# EAGLE board Smart_Current_Sensor_ETH_2 (EAGLE 7.4.0)
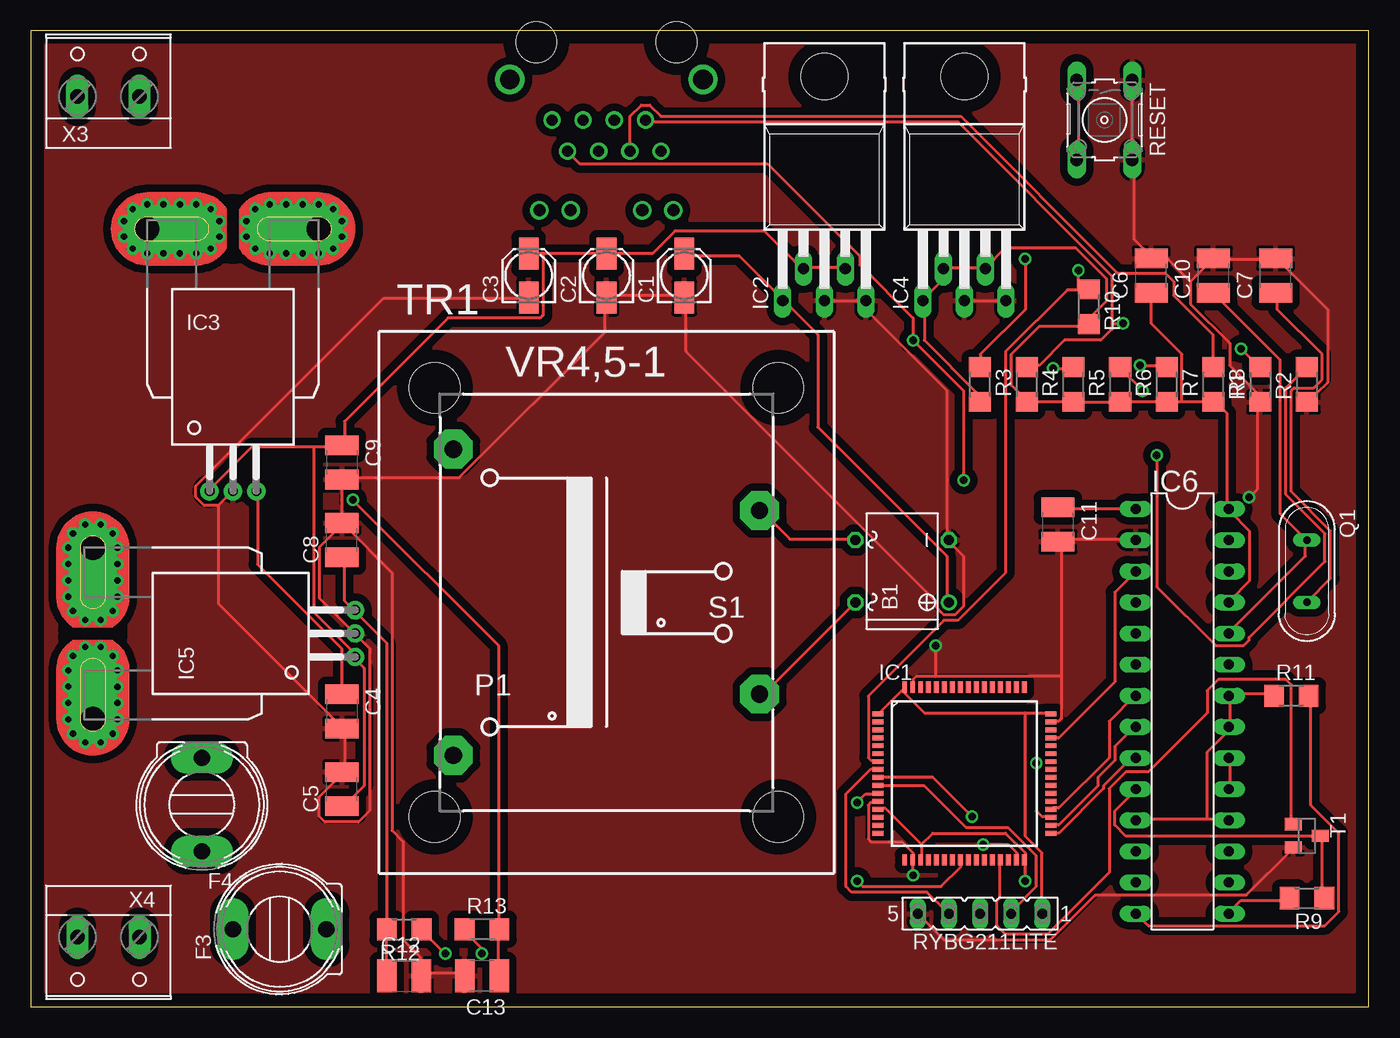
[diagram p0: board, top side]
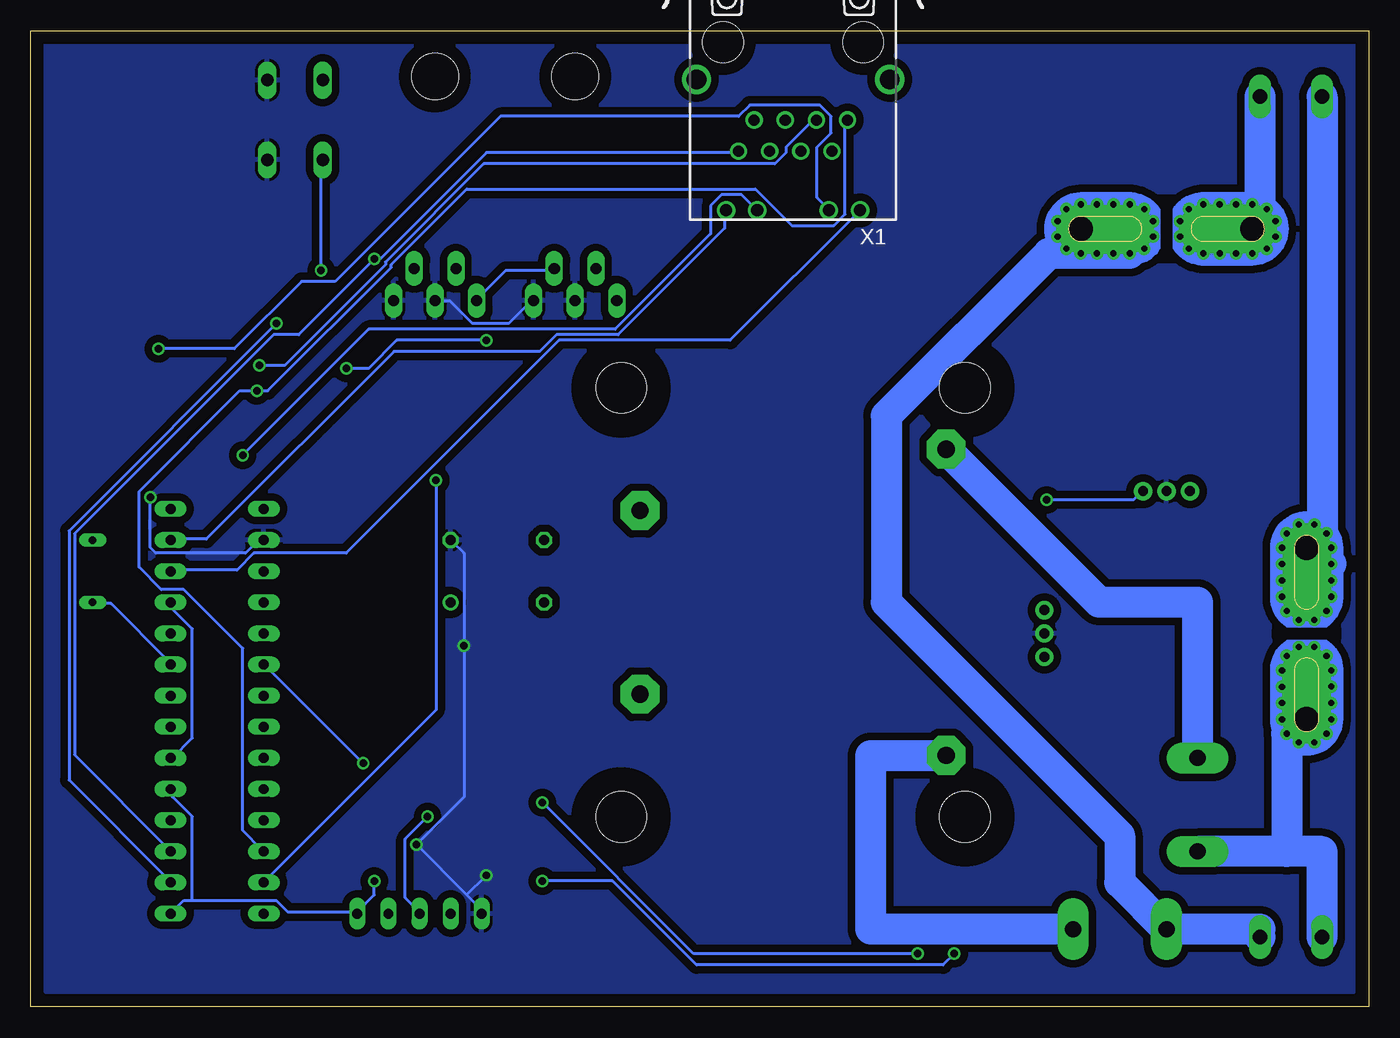
[diagram p1: board, bottom side, seen from below]

Size 109.2 x 79.68 mm. Coordinates in mm from the lower left corner, seen from the top.
Outline: 0,0 109.2,0 109.2,79.68 0,79.68 0,0
Copper layers (1*16): Top 0.035mm / dielectric 1.5mm / Bottom 0.035mm
Design rules "default": minimum track width 10mil, minimum drill 24mil, track to track 8mil, track to pad 8mil, pad to pad 8mil, via to via 8mil, smd to smd 8mil, copper to edge 40mil, drill to drill 8mil, minimum pad ring 10mil, minimum via ring 8mil, stop-mask expansion 4mil, vias tented up to drill 0mil, thermal gap 10mil

## Footprints (pad centres in the part's own frame; a part is rotated, then mirrored left to right if it is on the bottom)
B-DIL = drill 0.813: + -2.54,-3.81 | drill 0.813 octagon: - 2.54,-3.81; AC1 2.54,3.81; AC2 -2.54,3.81
153CLV-0405 = smd 2.6 x 1.6: + 1.8,0; - -1.8,0
C1210 = smd 1.6 x 2.7: 1 -1.4,0; 2 1.4,0
KS9V = drill 1.321 pad 2.54 long: 1 0,3.81; 2 0,-3.81
LQFP64_PACKAGE = smd 0.9 x 0.4: 1 -7.05,4.875; 2 -7.05,4.225; 3 -7.05,3.575; 4 -7.05,2.925; 5 -7.05,2.275; 6 -7.05,1.625; 7 -7.05,0.975; 8 -7.05,0.325; 9 -7.05,-0.325; 10 -7.05,-0.975; 11 -7.05,-1.625; 12 -7.05,-2.275; 13 -7.05,-2.925; 14 -7.05,-3.575; 15 -7.05,-4.225; 16 -7.05,-4.875; 33 7.05,-4.875; 34 7.05,-4.225; 35 7.05,-3.575; 36 7.05,-2.925; 37 7.05,-2.275; 38 7.05,-1.625; 39 7.05,-0.975; 40 7.05,-0.325; 41 7.05,0.325; 42 7.05,0.975; 43 7.05,1.625; 44 7.05,2.275; 45 7.05,2.925; 46 7.05,3.575; 47 7.05,4.225; 48 7.05,4.875 | smd 0.4 x 0.9: 17 -4.875,-7.05; 18 -4.225,-7.05; 19 -3.575,-7.05; 20 -2.925,-7.05; 21 -2.275,-7.05; 22 -1.625,-7.05; 23 -0.975,-7.05; 24 -0.325,-7.05; 25 0.325,-7.05; 26 0.975,-7.05; 27 1.625,-7.05; 28 2.275,-7.05; 29 2.925,-7.05; 30 3.575,-7.05; 31 4.225,-7.05; 32 4.875,-7.05; 49 4.875,7.05; 50 4.225,7.05; 51 3.575,7.05; 52 2.925,7.05; 53 2.275,7.05; 54 1.625,7.05; 55 0.975,7.05; 56 0.325,7.05; 57 -0.325,7.05; 58 -0.975,7.05; 59 -1.625,7.05; 60 -2.275,7.05; 61 -2.925,7.05; 62 -3.575,7.05; 63 -4.225,7.05; 64 -4.875,7.05
TO220-52 = drill 0.9 long: 1 -3.4,-21.1; 2 -1.7,-18.47; 3 0,-21.1; 4 1.7,-18.47; 5 3.4,-21.1 | hole 3.8: 0,-2.8
ACS75050 = drill 0.8 pad 1.5: 1 -1.91,-21.4; 2 0,-21.4; 3 1.91,-21.4 | drill 2 pad 4 offset: IP+ 7,0; IP- -7,0 | drill 0.5 pad 0.9: IP+@2 8.89,-0.635; IP+@3 8.89,0.635; IP+@4 8.175,1.625; IP+@5 7,2; IP+@6 5.675,2; IP+@7 4.325,2; IP+@8 3,2; IP+@9 1.825,1.625; IP+@10 1.1,0.625; IP+@11 1.1,-0.625; IP+@12 1.825,-1.625; IP+@13 3,-2; IP+@14 4.325,-2; IP+@15 5.675,-2; IP+@16 7,-2; IP+@17 8.175,-1.625; IP-@2 -8.89,-0.635; IP-@3 -8.89,0.635; IP-@4 -8.175,1.625; IP-@5 -7,2; IP-@6 -5.675,2; IP-@7 -4.325,2; IP-@8 -3,2; IP-@9 -1.825,1.625; IP-@10 -1.1,0.625; IP-@11 -1.1,-0.625; IP-@12 -1.825,-1.625; IP-@13 -3,-2; IP-@14 -4.35,-2; IP-@15 -5.675,-2; IP-@16 -7,-2; IP-@17 -8.175,-1.625
DIL28-3 = drill 0.813 long: 1 -16.51,-3.81; 2 -13.97,-3.81; 3 -11.43,-3.81; 4 -8.89,-3.81; 5 -6.35,-3.81; 6 -3.81,-3.81; 7 -1.27,-3.81; 8 1.27,-3.81; 9 3.81,-3.81; 10 6.35,-3.81; 11 8.89,-3.81; 12 11.43,-3.81; 13 13.97,-3.81; 14 16.51,-3.81; 15 16.51,3.81; 16 13.97,3.81; 17 11.43,3.81; 18 8.89,3.81; 19 6.35,3.81; 20 3.81,3.81; 21 1.27,3.81; 22 -1.27,3.81; 23 -3.81,3.81; 24 -6.35,3.81; 25 -8.89,3.81; 26 -11.43,3.81; 27 -13.97,3.81; 28 -16.51,3.81
QS = drill 0.61 long: 1 -2.54,0; 2 2.54,0
R1206 = smd 1.6 x 1.803: 1 -1.422,0; 2 1.422,0
B3F-10XX = drill 1.016 long: 1 -3.251,2.261; 2 3.251,2.261; 3 -3.251,-2.261; 4 3.251,-2.261
FE05-1 = drill 0.813 long: 1 -5.08,0; 2 -2.54,0; 3 0,0; 4 2.54,0; 5 5.08,0
SOT23 = smd 1 x 1.4: 1 -0.95,-1.1; 2 0.95,-1.1; 3 0,1.1
VR04,5-1 = drill 1.397 pad 3.175 octagon: 1 -12.497,12.497; 2 -12.497,-12.497; 3 12.497,-7.493; 4 12.497,7.493 | hole 4.115: -14.021,-17.501; -14.021,17.501; 14.021,17.501; 14.021,-17.501
J1 = drill 0.9 pad 1.3: 1 4.445,2.54; 2 3.175,0; 3 1.905,2.54; 4 0.635,0; 5 -0.635,2.54; 6 -1.905,0; 7 -3.175,2.54; 8 -4.445,0 | drill 1 pad 1.422: 9 5.465,7.37; 10 2.925,7.37; 11 -2.925,7.37; 12 -5.465,7.37 | drill 1.6 pad 2.184: M1 -7.875,-3.3; M2 7.875,-3.3 | hole 3.3: 5.715,-6.35; -5.715,-6.35
W237-132 = drill 1.194 long: 1 -2.54,-0.635; 2 2.54,-0.635

## Placement (x,y rotation side)
B1  [B-DIL]  71.12,35.56 90 top
C1  680uF  [153CLV-0405]  53.34,59.69 90 top
C2  220uF  [153CLV-0405]  46.99,59.69 90 top
C3  220uF  [153CLV-0405]  40.64,59.69 90 top
C4  1uF  [C1210]  25.4,24.13 270 top
C5  1uF  [C1210]  25.4,17.78 90 top
C6  1uF  [C1210]  91.44,59.69 90 top
C7  20pF  [C1210]  101.6,59.69 90 top
C8  1uF  [C1210]  25.4,38.1 90 top
C9  1uF  [C1210]  25.4,44.45 270 top
C10  20pF  [C1210]  96.52,59.69 90 top
C11  10uF  [C1210]  83.82,39.37 270 top
C12  10nF  [C1210]  30.48,2.54 0 top
C13  10nF  [C1210]  36.83,2.54 180 top
F3  [KS9V]  20.32,6.35 90 top
F4  [KS9V]  13.97,16.51 180 top
IC1  STM32U535_U545_LQFP64  [LQFP64_PACKAGE]  76.2,19.05 0 top
IC2  [TO220-52]  64.77,78.74 0 top
IC3  ACS750SCA-050  [ACS75050]  16.51,63.5 0 top
IC4  [TO220-52]  76.2,78.74 0 top
IC5  ACS750SCA-050  [ACS75050]  5.08,30.48 90 top
IC6  ENC28J60SP  [DIL28-3]  93.98,24.13 270 top
Q1  25MHz  [QS]  104.14,35.56 270 top
R1  1k  [R1206]  100.33,50.8 90 top
R2  1k  [R1206]  104.14,50.8 90 top
R3  1k  [R1206]  77.47,50.8 270 top
R4  1k  [R1206]  81.28,50.8 270 top
R5  1k  [R1206]  85.09,50.8 270 top
R6  1k  [R1206]  88.9,50.8 270 top
R7  1k  [R1206]  92.71,50.8 270 top
R8  1k  [R1206]  96.52,50.8 270 top
R9  10k  [R1206]  104.14,8.89 180 top
R10  10k  [R1206]  86.36,57.15 270 top
R11  10k  [R1206]  102.87,25.4 0 top
R12  100  [R1206]  30.48,6.35 180 top
R13  100  [R1206]  36.83,6.35 0 top
RESET  [B3F-10XX]  87.63,72.39 270 top
RYBG211LITE  [FE05-1]  77.47,7.62 180 top
T1  BC848  [SOT23]  104.14,13.97 270 top
TR1  [VR04,5-1]  46.99,33.02 0 top
X1  J1006F01P  [J1]  46.99,72.39 180 bottom
X3  [W237-132]  6.35,74.93 0 top
X4  [W237-132]  6.35,5.08 180 top

## Library data of the parts
B1 = rectifier
C1-C3 = rcl
C4-C13 = eagle-ltspice; SPICEMODEL: NONE; SPICEPREFIX: C
F3 F4 = fuse; OC_FARNELL: unknown; OC_NEWARK: unknown
IC1 = STM23UXX
IC2 IC4 = linear
IC3 IC5 = allegro; MF: ALLEGRO MICROSYSTEMS, INC.; MPN: ACS750SCA-050; OC_FARNELL: 1457175; OC_NEWARK: 81H6588
IC6 = microchip; MF: MICROCHIP; MPN: ENC28J60/SP; OC_FARNELL: 1084619; OC_NEWARK: 96K3661
Q1 = special
R1-R13 = eagle-ltspice; SPICEMODEL: NONE; SPICEPREFIX: R
RESET = switch-omron; MPN: B3F-1000; OC_FARNELL: 176432; OC_NEWARK: 36M3542
RYBG211LITE = con-lsta; OC_FARNELL: unknown; OC_NEWARK: unknown
T1 = transistor
TR1 = trafo
X1 = con-pulse; OC_FARNELL: unknown; OC_NEWARK: unknown
X3 X4 = con-wago-508; OC_FARNELL: unknown; OC_NEWARK: unknown

## Nets
+5V: C2.+ C3.+ C5.1 C6.1 C9.1 IC1.1 IC1.13 IC1.19 IC1.32 IC1.48 IC1.64 IC2.2 IC2.4 IC3.1 IC4.1 IC4.2 IC4.4 IC5.1 IC6.15 IC6.19 IC6.20 IC6.25 IC6.28 R3.2 R4.2 R5.2 R6.2 R7.2 R8.2 R9.2 R10.2 RYBG211LITE.1
GND: B1.- C1.- C2.- C3.- C4.2 C5.2 C6.2 C7.2 C8.2 C9.2 C10.2 C11.2 C12.2 C13.2 IC1.12 IC1.18 IC1.31 IC1.47 IC1.63 IC2.3 IC2.5 IC3.2 IC4.3 IC4.5 IC5.2 IC6.2 R1.1 R2.1 RESET.1 RESET.2 RYBG211LITE.5 T1.2
N$1: B1.AC1 TR1.4
N$2: B1.AC2 TR1.3
N$3: R1.2 X1.11
N$4: B1.+ C1.+ IC2.1
N$5: IC5.IP+ IC5.IP+@2 IC5.IP+@3 IC5.IP+@4 IC5.IP+@5 IC5.IP+@6 IC5.IP+@7 IC5.IP+@8 IC5.IP+@9 IC5.IP+@10 IC5.IP+@11 IC5.IP+@12 IC5.IP+@13 IC5.IP+@14 IC5.IP+@15 IC5.IP+@16 IC5.IP+@17 X3.1
N$6: IC3.IP- IC3.IP-@2 IC3.IP-@3 IC3.IP-@4 IC3.IP-@5 IC3.IP-@6 IC3.IP-@7 IC3.IP-@8 IC3.IP-@9 IC3.IP-@10 IC3.IP-@11 IC3.IP-@12 IC3.IP-@13 IC3.IP-@14 IC3.IP-@15 IC3.IP-@16 IC3.IP-@17 X3.2
N$7: C4.1 C13.1 IC3.3 R13.2
N$8: R2.2 X1.10
N$9: IC6.17 R3.1 X1.1
N$10: IC6.16 R4.1 X1.2
N$11: IC6.13 R5.1 X1.7
N$12: IC6.12 R6.1 X1.8
N$13: IC1.8 RYBG211LITE.4
N$14: IC6.27 X1.9
N$15: IC6.26 X1.12
N$16: IC1.9 RYBG211LITE.3
N$17: IC1.10 RYBG211LITE.2
N$18: IC1.7 R10.1 RESET.3 RESET.4
N$19: R7.1 X1.6
N$20: F4.2 TR1.1
N$21: F4.1 IC5.IP- IC5.IP-@2 IC5.IP-@3 IC5.IP-@4 IC5.IP-@5 IC5.IP-@6 IC5.IP-@7 IC5.IP-@8 IC5.IP-@9 IC5.IP-@10 IC5.IP-@11 IC5.IP-@12 IC5.IP-@13 IC5.IP-@14 IC5.IP-@15 IC5.IP-@16 IC5.IP-@17 X4.2
N$22: C8.1 C12.1 IC5.3 R12.2
N$23: R8.1 X1.3
N$24: IC6.11 IC6.18 IC6.21 IC6.22 R11.1
N$25: IC1.36 IC6.7
N$26: C7.1 IC6.23 Q1.2
N$27: C10.1 IC6.24 Q1.1
N$28: IC1.34 IC6.8
N$29: IC1.35 IC6.6
N$30: IC1.33 IC6.9
N$31: IC1.29 T1.1
N$32: IC6.10 R9.1 T1.3
N$33: IC6.14 R11.2
N$34: C11.1 IC6.1
N$35: IC1.45 IC6.3
N$36: IC1.24 R12.1
N$37: IC1.11 R13.1
N$38: F3.2 TR1.2
N$39: F3.1 IC3.IP+ IC3.IP+@2 IC3.IP+@3 IC3.IP+@4 IC3.IP+@5 IC3.IP+@6 IC3.IP+@7 IC3.IP+@8 IC3.IP+@9 IC3.IP+@10 IC3.IP+@11 IC3.IP+@12 IC3.IP+@13 IC3.IP+@14 IC3.IP+@15 IC3.IP+@16 IC3.IP+@17 X4.1

## Tracks (layer width: path | path; a pad name or v marks a point on that pad's centre or on a via)
+5V  (via drill 0.61)
  Top 0.254: IC6.25 97.84,33.15 99.44,34.75 99.44,38.86 97.84,40.46 IC6.28 97.61,40.69 97.61,48.46 96.7,49.38 R8.2 96.47,49.38 93.95,49.38 | 93.95,49.38 92.81,49.38 R7.2 92.58,49.38 88.92,49.38 R6.2 88.7,49.38 85.27,49.38 R5.2 85.04,49.38 81.38,49.38 R4.2 81.15,49.61 80.01,50.75 80.01,53.26 82.3,55.55 86.18,55.55 R10.2 86.41,55.78 86.41,56.24 87.78,57.61 87.78,59.44 85.27,61.95 79.55,61.95 77.95,60.35 IC4.4 77.72,60.35 74.52,60.35 IC4.2 74.3,60.12 74.3,59.21 72.92,57.84 IC4.1 72.92,57.61 72.92,54.41 77.27,50.06 77.27,49.61 R3.2 | C6.1 91.44,55.78 93.95,53.26 93.95,49.38 | 71.09,25.83 71.32,26.06 IC1.64 | 71.09,25.83 69.27,24 IC1.1 | 81.15,24 72.92,24 71.09,25.83 | 81.15,24 83.21,24 IC1.48 | 72.69,13.26 72.69,12.12 IC1.19 | 72.69,13.26 69.72,16.23 69.27,16.23 IC1.13 | 72.69,13.26 73.61,14.17 79.55,14.17 81.15,12.57 81.15,12.12 IC1.32 81.15,11.89 v81.15,10.29 | IC6.19 97.84,17.83 97.84,20.12 IC6.20 | R9.2 102.64,8.69 98.75,8.69 97.84,7.77 IC6.15 | 81.15,24 81.15,13.95 82.53,12.57 82.53,7.77 RYBG211LITE.1 | C5.1 25.6,16.46 27.2,18.06 27.2,27.66 26.52,28.35 IC5.1 26.29,28.57 26.29,29.03 23.09,32.23 23.09,45.72 | 23.09,45.72 18.06,45.72 14.63,42.29 IC3.1 | 23.09,45.72 25.38,45.72 C9.1 25.6,45.95 25.6,47.78 34.06,56.24 41.6,56.24 41.83,56.46 41.83,61.49 | 41.83,61.49 46.86,61.49 C2.+ 47.09,61.49 50.75,61.49 52.58,63.32 59.89,63.32 62.87,60.35 IC2.2 63.09,60.35 66.29,60.35 IC2.4 | 41.83,61.49 40.69,61.49 C3.+
  Bottom 0.254: 96.01,8.69 96.7,8.69 97.61,7.77 IC6.15 | 96.01,8.69 89.15,8.69 88.24,7.77 82.75,7.77 RYBG211LITE.1 82.53,7.77 81.15,9.14 v81.15,10.29 | 96.01,8.69 96.01,15.54 97.61,17.14 97.61,17.6 IC6.19 | IC6.25 97.61,32.92 97.61,32.46 96.01,30.86 96.01,21.95 97.61,20.34 IC6.20 | IC2.4 66.52,60.12 70.41,60.12 72.69,57.84 IC4.1
GND  (via drill 0.61)
  Top 0.254: 15.32,40.92 14.17,40.92 13.49,41.6 13.49,42.52 28.8,57.84 40.46,57.84 C3.- | 15.32,40.92 16.46,42.06 IC3.2 | 15.32,40.92 15.32,32.92 25.38,22.86 C4.2 25.6,22.63 25.6,19.2 C5.2 25.38,18.97 23.55,17.14 23.55,15.54 24,15.09 26.75,15.09 27.66,16 27.66,29.26 26.52,30.4 IC5.2 26.29,30.63 23.55,33.38 23.55,37.49 25.38,39.32 C8.2 | C13.2 35.2,2.74 32,2.74 C12.2 31.77,2.74 31.77,4.12 30.4,5.49 30.4,13.49 29.49,14.4 29.49,35.43 25.6,39.32 C8.2 | C8.2 25.38,39.55 25.38,42.98 C9.2 25.6,43.2 34.98,43.2 46.86,55.09 46.86,57.84 C2.- 47.09,58.06 53.26,58.06 C1.- 53.49,57.84 53.49,53.49 73.84,33.15 73.84,32.69 74.52,32 75.44,32 76.12,32.69 76.12,36.8 74.98,37.95 B1.- 74.75,38.18 74.75,50.29 68.35,56.69 68.35,57.61 IC2.5 68.12,57.61 64.92,57.61 IC2.3 | R2.1 104.24,49.61 104.7,50.06 104.93,50.06 105.84,50.98 105.84,56.92 101.73,61.04 C7.2 101.5,61.04 96.7,61.04 C10.2 96.47,61.04 94.64,59.21 | RESET.1 89.84,75.44 89.84,69.27 RESET.2 90.07,69.04 90.07,62.64 91.44,61.27 C6.2 91.44,61.04 92.81,61.04 94.64,59.21 | 94.64,59.21 94.64,57.38 97.84,54.18 97.84,52.35 100.13,50.06 100.13,49.61 R1.1 100.13,49.38 100.13,42.29 v99.44,41.6 | IC1.12 69.04,16.69 68.58,16.69 68.35,16.46 68.35,13.72 68.58,13.49 71.09,13.49 72.01,12.57 72.01,12.12 IC1.18 72.01,11.89 v72.01,10.74 | v77.72,13.26 79.78,13.26 80.47,12.57 80.47,12.12 IC1.31 | RYBG211LITE.5 74.52,5.49 83.21,5.49 86.87,9.14 99.21,9.14 102.87,12.8 T1.2 | 84.12,26.98 84.12,37.72 83.9,37.95 C11.2 83.9,38.18 90.07,38.18 IC6.2 | 84.12,26.98 84.12,23.55 83.9,23.32 83.44,23.32 IC1.47 | 84.12,26.98 73.84,26.98
  Top 0.254: 73.84,26.98 72.24,26.98 72.01,26.75 72.01,26.29 IC1.63 | IC4.3 76.35,57.61 79.55,57.61 IC4.5 | v73.84,29.49 73.84,26.98
  Bottom 0.254: 73.61,9.14 72.24,7.77 RYBG211LITE.5 | 73.61,9.14 v77.72,13.26 73.84,17.14 v73.84,29.49 73.84,37.03 74.75,37.95 B1.- | 73.61,9.14 v72.01,10.74 | IC4.3 76.12,57.61 74.98,57.61 73.15,55.78 70.18,55.78 68.35,57.61 IC2.5 | v99.44,41.6 99.44,37.49 98.98,37.03 91.67,37.03 90.75,37.95 90.3,37.95 IC6.2
  pour Bottom (isolate 0.61): 1.27,78.74 107.95,78.74 107.95,1.27 1.27,1.27
  pour Top (isolate 0.61): 1.27,78.74 107.95,78.74 107.95,1.27 1.27,1.27
N$1
  Top 0.254: B1.AC1 67.21,38.18 61.95,38.18 59.66,40.46 TR1.4
N$2
  Top 0.254: B1.AC2 59.66,25.38 TR1.3
N$3  (via drill 0.61)
  Top 0.254: v98.75,53.72 100.13,52.35 R1.2
  Bottom 0.254: v98.75,53.72 92.58,53.72 87.1,59.21 84.35,59.21 70.87,72.69 51.44,72.69 50.52,73.61 44.81,73.61 43.89,72.69 43.89,71.32 45.03,70.18 45.03,66.06 44.12,65.15 X1.11
N$4
  Top 0.254: C1.+ 53.49,61.27 57.84,61.27 61.27,57.84 IC2.1 61.49,57.61 64.24,54.86 64.24,47.32 74.75,36.8 74.75,33.15 B1.+
N$5
  Bottom 2.54: X3.1 3.81,36.16 IC5.IP+@6
N$6
  Bottom 2.54: X3.2 8.89,63.5 IC3.IP-
N$7  (via drill 0.61)
  Top 0.254: C13.1 38.18,2.74 38.18,6.17 R13.2 38.18,6.4 38.18,29.49 v26.29,41.38 | C4.1 25.38,25.6 25.38,29.26 18.52,36.12 18.52,42.06 IC3.3
  Bottom 0.254: v26.29,41.38 19.2,41.38 18.52,42.06 IC3.3
N$8  (via drill 0.61)
  Top 0.254: v91.9,45.03 91.9,34.29 96.7,29.49 98.98,29.49 99.44,29.95 99.44,30.18 105.61,36.35 105.61,38.63 102.41,41.83 102.41,50.52 104.01,52.12 R2.2
  Bottom 0.254: v91.9,45.03 81.61,55.32 61.49,55.32 53.72,63.09 53.72,65.38 52.81,66.29 51.21,66.29 50.06,65.15 X1.10
N$9  (via drill 0.61)
  Top 0.254: v81.15,61.04 81.15,56.92 77.5,53.26 77.5,52.35 R3.1
  Bottom 0.254: X1.1 51.44,69.72 72.01,69.72 80.7,61.04 v81.15,61.04 87.33,54.86 89.38,54.86 105.61,38.63 105.61,20.57 97.84,12.8 IC6.17
N$10  (via drill 0.61)
  Top 0.254: 88.24,55.78 88.24,59.66 75.67,72.24 50.29,72.24 X1.2 | 88.24,55.78 88.24,55.32 87.33,54.41 84.35,54.41 82.3,52.35 81.38,52.35 R4.1 | 88.24,55.78 v89.15,55.78
  Bottom 0.254: v89.15,55.78 106.07,38.86 106.07,18.52 97.84,10.29 IC6.16
N$11  (via drill 0.61)
  Top 0.254: v83.44,52.12 85.04,52.12 R5.1 | X1.7 43.89,69.72 44.81,68.81 60.12,68.81 67.67,61.27 67.67,60.58 72.01,56.24 v72.01,54.41 76.12,50.29 v76.12,42.98
  Bottom 0.254: v83.44,52.12 81.61,52.12 79.32,54.41 v72.01,54.41 | v76.12,42.98 76.12,24.23 90.07,10.29 IC6.13
N$12  (via drill 0.61)
  Top 0.254: v90.75,50.29 88.92,52.12 R6.1
  Bottom 0.254: IC6.12 90.3,12.8 91.9,14.4 91.9,29.26 96.7,34.06 98.53,34.06 100.36,35.89 100.36,42.06 92.13,50.29 v90.75,50.29 89.84,50.29 79.78,60.35 79.78,60.58 73.61,66.75 50.06,66.75 47.09,63.78 43.66,63.78 42.75,64.69 42.75,72.24 X1.8
N$13
  Top 0.254: IC1.8 69.04,19.43 68.58,19.43 66.52,17.37 66.52,9.83 66.98,9.37 73.15,9.37 74.75,7.77 RYBG211LITE.4
N$14
  Bottom 0.254: IC6.27 97.61,38.18 94.87,38.18 79.55,53.49 67.67,53.49 66.29,54.86 61.27,54.86 52.58,63.55 52.58,64.92 X1.9
N$15
  Bottom 0.254: IC6.26 97.61,35.66 92.35,35.66 90.98,37.03 83.44,37.03 66.06,54.41 52.12,54.41 41.6,64.92 X1.12
N$16  (via drill 0.61)
  Top 0.254: v76.81,15.54 73.61,18.75 69.27,18.75 IC1.9
  Bottom 0.254: v76.81,15.54 78.64,13.72 78.64,8.91 77.5,7.77 RYBG211LITE.3
N$17
  Top 0.254: IC1.10 69.27,18.06 72.92,18.06 76.35,14.63 79.78,14.63 82.07,12.34 82.07,9.83 80.01,7.77 RYBG211LITE.2
N$18  (via drill 0.61)
  Top 0.254: RESET.4 85.5,69.27 85.5,75.44 RESET.3 | 85.5,58.52 86.18,58.52 R10.1 85.5,58.52 | 85.5,58.52 84.58,58.52 79.55,53.49 79.55,35.43 75.67,31.55 74.52,31.55 68.35,25.38 68.35,20.34 68.58,20.12 69.04,20.12 IC1.7 | 85.5,58.52 v85.5,60.12
  Bottom 0.254: v85.5,60.12 85.5,69.04 RESET.4
N$19  (via drill 0.61)
  Top 0.254: v90.53,52.35 92.58,52.35 R7.1
  Bottom 0.254: v90.53,52.35 88.47,52.35 80.24,60.58 80.24,60.81 72.24,68.81 48.46,68.81 47.55,69.72 47.55,70.18 45.26,72.47 X1.6
N$20
  Bottom 2.54: F4.2 13.97,33.02 22,33.02 TR1.1
N$21
  Bottom 2.54: IC5.IP-@17 6.71,12.7 | 6.71,12.7 F4.1 | X4.2 3.81,12.7 6.71,12.7
N$22
  Top 0.254: C12.1 29.03,2.74 29.03,6.17 R12.2 29.03,6.4 29.03,29.72 26.52,32.23 IC5.3 26.29,32.46 25.6,33.15 25.6,36.58 C8.1
N$23
  Top 0.254: R8.1 96.47,52.35 96.47,54.86 93.27,58.06 93.27,59.21 92.58,59.89 88.7,59.89 75.89,72.69 51.44,72.69 50.52,73.61 49.84,73.61 48.92,72.69 48.92,69.95 X1.3
N$24
  Top 0.254: R11.1 101.27,25.6 97.84,25.6 IC6.22 97.84,25.38 97.84,22.86 IC6.21 97.61,22.86 97.61,22.4 96.01,20.8 96.01,15.32 | 96.01,15.32 97.61,15.32 IC6.18 | 96.01,15.32 90.3,15.32 IC6.11
N$25
  Top 0.254: IC1.36 83.44,16.23 83.9,16.23 88.01,20.34 88.01,23.32 90.07,25.38 IC6.7
N$26
  Top 0.254: C7.1 101.73,58.06 101.73,56.92 105.39,53.26 105.39,51.21 104.7,50.52 103.1,50.52 102.87,50.29 102.87,42.06 106.07,38.86 106.07,34.98 104.24,33.15 Q1.2
  Bottom 0.254: Q1.2 104.01,32.92 102.64,32.92 97.84,28.12 IC6.23
N$27
  Top 0.254: IC6.24 97.84,30.63 104.01,36.8 104.01,37.95 Q1.1 104.01,38.18 101.96,40.23 101.96,52.81 96.7,58.06 C10.1
N$28
  Top 0.254: IC1.34 83.44,14.86 83.9,14.86 87.1,18.06 87.1,18.75 88.47,20.12 88.47,21.26 90.07,22.86 IC6.8
N$29  (via drill 0.61)
  Top 0.254: v82.07,19.89 82.07,16 82.53,15.54 83.21,15.54 IC1.35
  Bottom 0.254: v82.07,19.89 90.07,27.89 IC6.6
N$30
  Top 0.254: IC1.33 83.44,14.17 83.9,14.17 87.55,17.83 87.55,18.06 89.61,20.12 90.07,20.12 IC6.9
N$31
  Top 0.254: IC1.29 79.1,11.89 79.1,8.91 78.87,8.69 78.87,6.63 79.55,5.94 82.98,5.94 88.01,10.97 88.01,17.83 89.38,19.2 91.21,19.2 96.01,24 96.01,25.83 96.93,26.75 102.41,26.75 102.87,26.29 102.87,15.09 T1.1
N$32
  Top 0.254: R9.1 105.39,8.91 105.39,13.95 T1.3 105.16,13.95 89.38,13.95 88.47,14.86 88.47,16 90.07,17.6 IC6.10
N$33
  Top 0.254: R11.2 104.47,25.38 104.47,16.46 106.76,14.17 106.76,7.77 105.61,6.63 91.21,6.63 90.3,7.54 IC6.14
N$34
  Top 0.254: IC6.1 90.07,40.69 83.9,40.69 C11.1
N$35
  Top 0.254: IC1.45 83.44,21.95 83.9,21.95 88.47,26.52 88.47,33.83 90.07,35.43 IC6.3
N$36  (via drill 0.61)
  Top 0.254: v67.44,10.29 67.89,9.83 74.3,9.83 75.89,11.43 75.89,11.89 IC1.24 | v33.83,4.34 32,6.17 R12.1
  Bottom 0.254: v67.44,10.29 61.72,10.29 54.86,3.43 34.75,3.43 v33.83,4.34
N$37  (via drill 0.61)
  Top 0.254: v67.44,16.69 68.12,17.37 69.04,17.37 IC1.11 | v36.8,4.34 36.8,4.8 35.43,6.17 R13.1
  Bottom 0.254: v67.44,16.69 55.09,4.34 v36.8,4.34
N$38
  Bottom 2.54: F3.2 40.64,6.35 40.64,20.52 TR1.2
N$39
  Bottom 2.54: X4.1 8.89,6.35 F3.1 20.32,10.16 20.32,13.97 39.37,33.02 39.37,48.26 26.13,61.5 IC3.IP+@13